# Altium PCB SparkFun_Pro_Micro_v13a.PcbDoc
Units mil, origin at the board's own origin, x right, y up, seen from the top; angles counter-clockwise.
Board outline 700 x 1300 mil, 2 copper layers (Top, Bottom); 33 components, 42 nets, 128 pads, 47 vias.
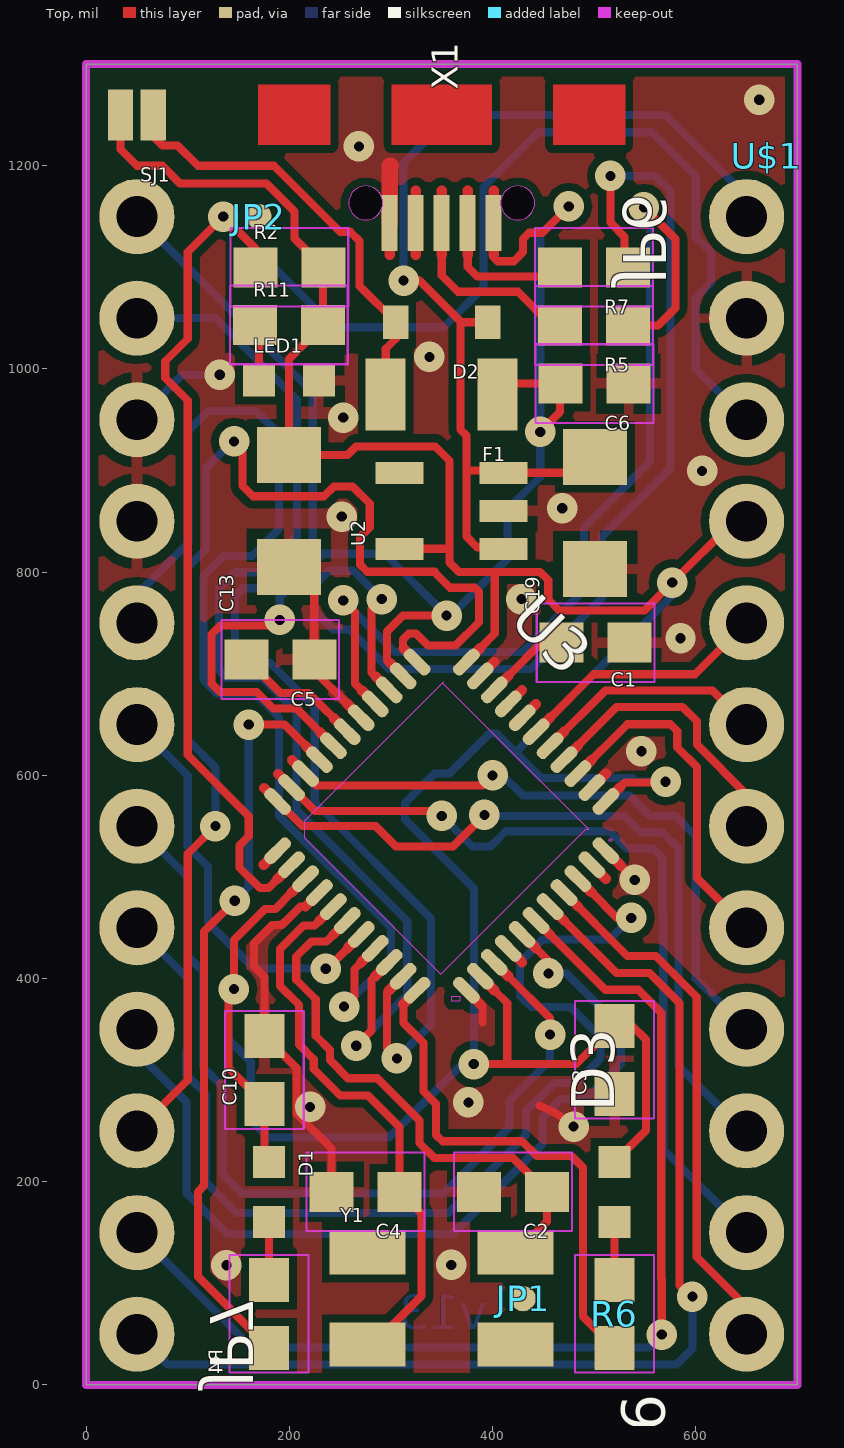
[diagram p0: Top view]
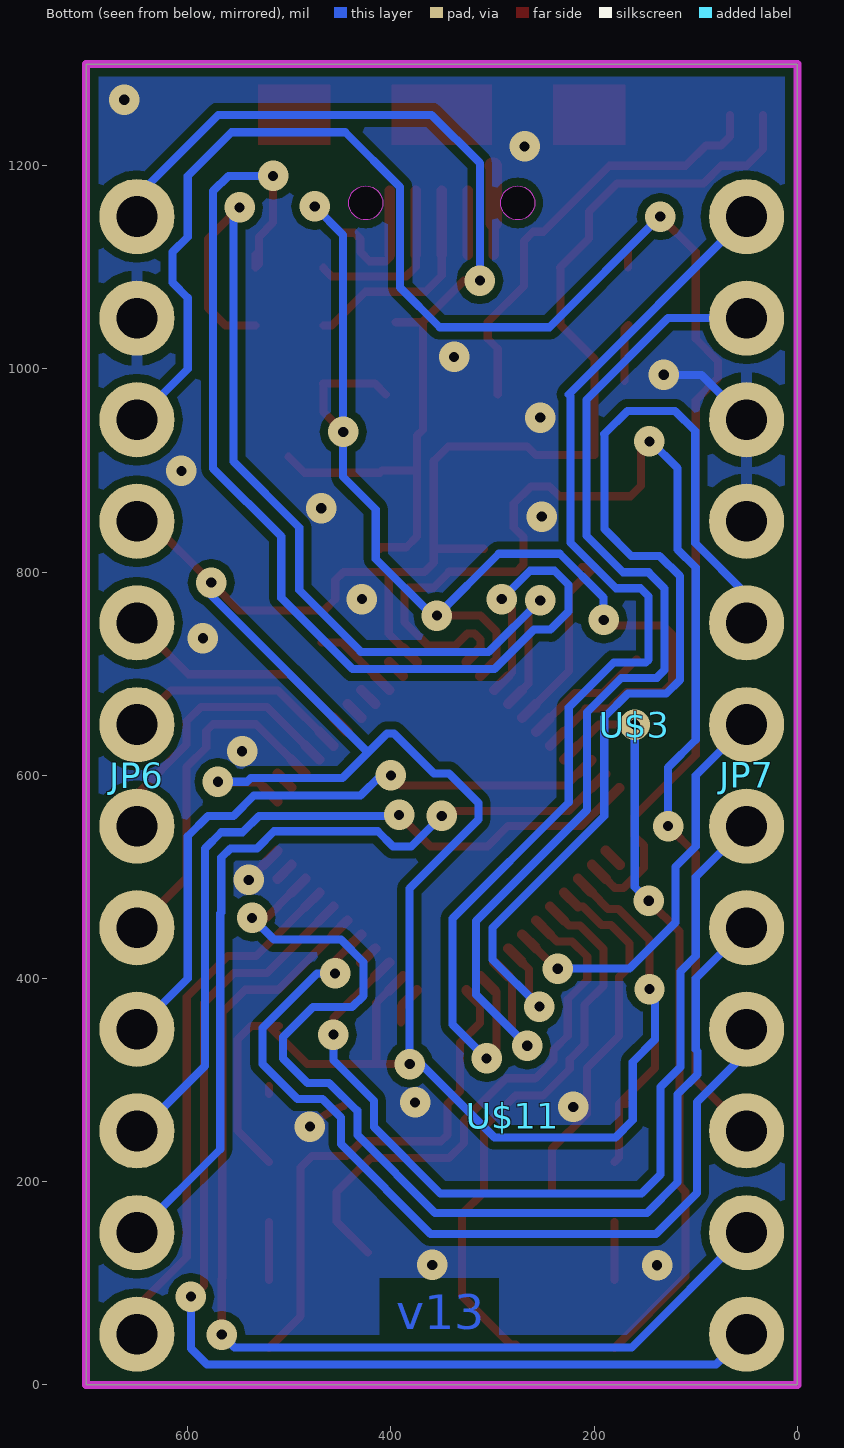
[diagram p1: Bottom view, seen from below]

## Layer stack, top to bottom
Top Solder: solder mask 0.4, Solder Resist, Dk 3.5
Top: signal copper 1.378
Dielectric 1: dielectric 12.6, FR-4, Dk 4.8
Bottom: signal copper 1.378
Bottom Solder: solder mask 0.4, Solder Resist, Dk 3.5

## Board outline
700,1300 0,1300 0,0 700,0
cut-out: 275.2,1146.66 ccw(c275.2,1163.39) 291.93,1163.39 ccw(c275.2,1163.39) 275.2,1180.12 ccw(c275.2,1163.39) 258.47,1163.39 ccw(c275.2,1163.39)
cut-out: 424.8,1146.66 ccw(c424.8,1163.39) 441.53,1163.39 ccw(c424.8,1163.39) 424.8,1180.12 ccw(c424.8,1163.39) 408.07,1163.39 ccw(c424.8,1163.39)

## Design rules (kind name [scope] priority, off if disabled: settings)
BoardOutlineClearance mdCopperDimension [All] p1: gap=10 ignorepadtopadclearanceinfootprint=FALSE except(0: Arc-SplitContinuation Track-SplitContinuation SMDPad-SplitContinuation THPad-SplitContinuation Via-SplitContinuation Fill-SplitContinuation Poly-SplitContinuation Region-SplitContinuation Text-SplitContinuation; 7: Poly-OutlineEdge Poly-CavityEdge Poly-CutoutEdge Poly-SplitBarrior)
Clearance Clearance_for_PolygonClass_Isolate_8 [InPolygonClass('Isolate_8') vs IsArc Or IsTrack Or IsPad Or IsVia Or IsFill Or IsRegion Or IsText] p1: gap=8 ignorepadtopadclearanceinfootprint=FALSE
Clearance "Clearance (Same Net)" [All] p2: gap=7 ignorepadtopadclearanceinfootprint=FALSE
Clearance [All] p3: gap=7 ignorepadtopadclearanceinfootprint=FALSE
HoleSize HoleSize_For_NetClass_vcc [InNetClass('vcc')] p1: absolutevalues=TRUE maxlimit=0 minlimit=0 maxpercent=80.000 minpercent=20.000
HoleSize [All] p2: absolutevalues=TRUE maxlimit=100000 minlimit=15 maxpercent=80.000 minpercent=20.000
HoleToHoleClearance mdDrill [All] p1: gap=7 allowstackedmicrovias=TRUE
MinimumSolderMaskSliver [All] p1 off: minsoldermaskwidth=10
PasteMaskExpansion Expansion_SMDPaste_OFF [InPadClass('SMDPaste_OFF')] p1: expansion=0
PasteMaskExpansion mlMinCreamFrame [All] p2: expansion=0
PolygonConnect PolygonConnect_For_PolygonThermal_ON_Width100000_Gap100000 [InPolygonClass('PolygonThermal_ON_Width100000_Gap100000') vs Not IsVia] p1: connectstyle=Relief reliefconductorwidth=10 reliefentries=4 polygonreliefangle="90 Angle" airgapwidth=10
PolygonConnect ThermalVias [IsVia] p2: connectstyle=Direct reliefconductorwidth=10 reliefentries=4 polygonreliefangle="90 Angle" airgapwidth=10
PolygonConnect [All] p3: connectstyle=Relief reliefconductorwidth=10 reliefentries=4 polygonreliefangle="90 Angle" airgapwidth=10
RoutingVias [All] p1: holewidth=15 width=35 viastyle="Through Hole" minholewidth=15 minwidth=35 maxholewidth=100 maxwidth=100
SolderMaskExpansion mlMinStopFrame [All] p1: expansion=4 istentingtop=FALSE
Width Width_For_NetClass_vcc [InNetClass('vcc')] p1: maxlimit=10 minlimit=99999 preferedwidth=5 toplayer_minwidth=0 bottomlayer_minwidth=0 minimp=50.000000 maximp=50.000000 favimp=50.000000
Width [All] p2: maxlimit=10 minlimit=8 preferedwidth=8
26 further rules are at their usual default settings.

## Classes and differential pairs
polygon class PolygonThermal_ON_Width100000_Gap100000: Polygon_1_Net_GND Polygon_2_Net_GND
polygon class Isolate_8: Polygon_1_Net_GND Polygon_2_Net_GND
pad class SMDPaste_OFF: JP1-1 JP2-1
net class vcc: GND RAW

## Components (designator, comment, footprint, x,y, rotation, side; value= is the part's Value field where it differs from the comment)
C1 "0.1uF" 0603-CAP 501.5,730.6 r180 top
C2 "22pF" 0603-CAP 420,190 r180 top
C3 "0.1uF" 0603-CAP 520,320 r90 top
C4 "22pF" 0603-CAP 275,190 r180 top
C5 "1uF" 0603-CAP 191.1,714 r180 top
C6 "1uF" 0603-CAP 500.5,985.6 r180 top
C10 "1uF" 0603-CAP 175.5,310 r90 top
C13 "10uF" EIA3216 199.5,860.3 r90 top
C19 "10uF" EIA3216 500.9,858.4 r90 top
D1 "Yellow" LED-0603 180,190 r180 top
D2 "" SOD-323 350,1046 r180 top
D3 "Green" LED-0603 520,190 r180 top
F1 "500mA" PTC-1206 350,975 r180 top
FRAME1 "" CREATIVE_COMMONS -679.22,-400 r0 top
JP1 "" MICRO-FIDUCIAL 430,85 r0 top
JP2 "" MICRO-FIDUCIAL 170,1150 r0 top
JP6 "" 1X12 650,1150 r270 bottom
JP7 "" 1X12 50,50 r90 bottom
LED1 "Red" LED-0603 199.5,988.4 r270 top
R2 "10K" 0603-RES 200,1100 r0 top
R4 "330" 0603-RES 180,70 r90 top
R5 "22" 0603-RES 500,1042.8 r180 top
R6 "330" 0603-RES 520,70 r90 top
R7 "22" 0603-RES 500,1100 r180 top
R11 "1K" 0603-RES 199.5,1043.3 r0 top
SJ1 "Closed for 5V Board" SJ_2S 50,1250 r180 top
U2 "MIC5219" SOT23-5 359.7,860.4 r90 top
U3 "ATMEGA32U4" QFN-44-NOPAD_1:1-OUTFAKES 350,550 r315 top
U$1 "" SFE-LOGO-FLAME 670,1210 r90 top
U$3 "" OSHW-LOGO-S 160,650 r90 bottom
U$11 "" SFE-NEW-WEBLOGO 280,265 r90 bottom
X1 "" USB-AB-MICRO-SMD-V03-IN&OUT 350,1250 r270 top
Y1 "16MHz" CRYSTAL-SMD-5X3 350,85 r0 top

## Footprints (in the part's own frame and the unit in brackets; to place one, negate y for a bottom-side part, rotate by r counter-clockwise, add the part's x,y. Pads: shape width x height; smd on the part's side, far side on the other; paste and mask are expansions set on the pad)
1X12 [mil] "1X12"
  round 74 hole 40: 1(0,0) 2(100,0) 3(200,0) 4(300,0) 5(400,0) 6(500,0) 7(600,0) 8(700,0) 9(800,0) 10(900,0) 11(1000,0) 12(1100,0)
0603-CAP [mm] "0603-CAP"
  rect 1.1x1 smd: 1(-0.85,0) 2(0.85,0)
  Top keep-out lines w0.051: 1.473,0.983 1.473,-0.983 -1.473,-0.983 -1.473,0.983 1.473,0.983
0603-RES [mm] "0603-RES"
  rect 1.1x1 smd: 1(-0.85,0) 2(0.85,0)
  Top keep-out lines w0.051: -1.473,-0.983 -1.473,0.983 1.473,0.983 1.473,-0.983 -1.473,-0.983
CREATIVE_COMMONS [mil] "CREATIVE_COMMONS"
CRYSTAL-SMD-5X3 [mil] "CRYSTAL-SMD-5X3"
  rect 74.8x43.31 smd: 1(-72.83,-45.28) 2(72.83,-45.28) 3(72.83,45.28) 4(-72.83,45.28)
EIA3216 [mil] "EIA3216"
  rect 55.12x62.99 smd: A(55.12,0) C(-55.12,0)
LED-0603 [mil] "LED-0603"
  rect 31.5x31.5 smd: A(0,-29.53) C(0,29.53)
MICRO-FIDUCIAL [mil] "MICRO-FIDUCIAL"
  rrect100% 25x25 smd paste+0: 1(0,0)
OSHW-LOGO-S [mil] "OSHW-LOGO-S"
PTC-1206 [mm] "PTC-1206"
  rect 1x1.8 smd: 1(-1.4,0) 2(1.4,0)
QFN-44-NOPAD_1:1-OUTFAKES [mil] "QFN-44-NOPAD_1:1-OUTFAKES"
  rrect85% 31.5x11.81 smd: 1(-131.36,97.05) 2(-131.36,77.64) 3(-131.36,58.23) 4(-131.36,38.82) 5(-131.36,19.41) 6(-131.36,0) 7(-131.36,-19.41) 8(-131.36,-38.82) 9(-131.36,-58.23) 10(-131.36,-77.64) 11(-131.36,-97.05) 23(131.36,-97.05) 24(131.36,-77.64) 25(131.36,-58.23) 26(131.36,-38.82) 27(131.36,-19.41) 28(131.36,0) 29(131.36,19.41) 30(131.36,38.82) 31(131.36,58.23) 32(131.36,77.64) 33(131.36,97.05)
  rrect85% 11.81x31.5 smd: 12(-97.05,-131.36) 13(-77.64,-131.36) 14(-58.23,-131.36) 15(-38.82,-131.36) 16(-19.41,-131.36) 17(0,-131.36) 18(19.41,-131.36) 19(38.82,-131.36) 20(58.23,-131.36) 21(77.64,-131.36) 22(97.05,-131.36) 34(97.05,131.36) 35(77.64,131.36) 36(58.23,131.36) 37(38.82,131.36) 38(19.41,131.36) 39(0,131.36) 40(-19.41,131.36) 41(-38.82,131.36) 42(-58.23,131.36) 43(-77.64,131.36) 44(-97.05,131.36)
  Top lines w10: -97.05,-150.77 -97.05,-131.36 ; -150.14,-97.05 -131.36,-97.05 ; -77.64,-150.77 -77.64,-131.36 ; -150.14,-77.64 -131.36,-77.64 ; -58.23,-150.77 -58.23,-131.36 ; -150.14,-58.23 -131.36,-58.23 ; -38.82,-150.77 -38.82,-131.36 ; -150.14,-38.82 -131.36,-38.82 ; -19.41,-150.77 -19.41,-131.36 ; -150.14,-19.41 -131.36,-19.41 ; 0,-150.77 0,-131.36 ; -150.14,0 -131.36,0 ; 19.41,-150.77 19.41,-131.36 ; -150.14,19.41 -131.36,19.41 ; 38.82,-150.77 38.82,-131.36 ; -150.14,38.82 -131.36,38.82 ; 58.23,-150.77 58.23,-131.36 ; -150.14,58.23 -131.36,58.23 ; 77.64,-150.77 77.64,-131.36 ; -150.14,77.64 -131.36,77.64 ; 97.05,-150.77 97.05,-131.36 ; -150.14,97.05 -131.36,97.05 ; 131.36,-97.05 150.77,-97.05 ; -97.05,131.36 -97.05,150.77 ; 131.36,-77.64 150.77,-77.64 ; -77.64,131.36 -77.64,150.77 ; 131.36,-58.23 150.77,-58.23 ; -58.23,131.36 -58.23,150.77 ; 131.36,-38.82 150.77,-38.82 ; -38.82,131.36 -38.82,150.77 ; 131.36,-19.41 150.77,-19.41 ; -19.41,131.36 -19.41,150.77 ; 131.36,0 150.77,0 ; 0,131.36 0,150.77 ; 131.36,19.41 150.77,19.41 ; 19.41,131.36 19.41,150.77 ; 131.36,38.82 150.77,38.82 ; 38.82,131.36 38.82,150.77 ; 131.36,58.23 150.77,58.23 ; 58.23,131.36 58.23,150.77 ; 131.36,77.64 150.77,77.64 ; 77.64,131.36 77.64,150.77 ; 131.36,97.05 150.77,97.05 ; 97.05,131.36 97.05,150.77
SFE-LOGO-FLAME [mil] "SFE-LOGO-FLAME"
SFE-NEW-WEBLOGO [mil] "SFE-NEW-WEBLOGO"
SJ_2S [mil] "SJ_2S"
  rect 25x50 smd: 1(-16.22,0) 2(16.22,0)
SOD-323 [mil] "SOD-323"
  rect 24.8x32.68 smd: 1(-45.28,0) 2(45.28,0)
SOT23-5 [mil] "SOT23-5"
  rect 21.65x47.24 smd: 1(-37.4,-51.19) 2(0,-51.19) 3(37.4,-51.19) 4(37.4,51.19) 5(-37.4,51.19)
USB-AB-MICRO-SMD-V03-IN&OUT [mm] "USB-AB-MICRO-SMD-V03-IN&OUT"
  rect 1.4x0.4 smd: D+1(2.7,0) D-1(2.7,0.65) GND1(2.7,-1.3) ID1(2.7,-0.65) VBUS1(2.7,1.3)
  Top region: -0.75,-4.584 -0.75,-2.784 0.75,-2.784 0.75,-4.584
  Top region: -0.75,-1.25 -0.75,1.25 0.75,1.25 0.75,-1.25
  Top region: -0.75,2.784 -0.75,4.584 0.75,4.584 0.75,2.784
  Top lines w0.254: 3.505,-1.3 2.7,-1.3 1.895,-1.3 ; 3.505,-0.65 2.7,-0.65 1.895,-0.65 ; 3.505,0 2.7,0 1.895,0 ; 3.505,0.65 2.7,0.65 1.895,0.65 ; 3.505,1.3 2.7,1.3 1.895,1.3

## Part data
C1 C2 C3 C4 C5 C6 C10: library part 0603-CAP, PackageName=0603-CAP
C13 C19: library part EIA3216, PackageName=EIA3216
D1 D3 LED1: library part LED-0603, PackageName=LED-0603
D2: library part SOD-323, PackageName=SOD-323
F1: library part PTC-1206, PackageName=PTC-1206
FRAME1: library part CREATIVE_COMMONS, PackageName=CREATIVE_COMMONS
JP1 JP2: library part MICRO-FIDUCIAL, PackageName=MICRO-FIDUCIAL
JP6 JP7: library part 1X12, PackageName=1X12
R2 R4 R5 R6 R7 R11: library part 0603-RES, PackageName=0603-RES
SJ1: library part SJ_2S, PackageName=SJ_2S
U2: library part SOT23-5, PackageName=SOT23-5
U3: library part QFN-44-NOPAD_1:1-OUTFAKES, PackageName=QFN-44-NOPAD_1:1-OUTFAKES
U$1: library part SFE-LOGO-FLAME, PackageName=SFE-LOGO-FLAME
U$3: library part OSHW-LOGO-S, PackageName=OSHW-LOGO-S
U$11: library part SFE-NEW-WEBLOGO, PackageName=SFE-NEW-WEBLOGO
X1: library part USB-AB-MICRO-SMD-V03-IN&OUT, PackageName=USB-AB-MICRO-SMD-V03-IN&OUT
Y1: library part CRYSTAL-SMD-5X3, PackageName=CRYSTAL-SMD-5X3

## Free pads (board coordinates)
  round 33.46 hole 33.46 unplated: MH1(424.8,1163.39) MH2(275.2,1163.39)

## Via types
v1: diameter 30/30 (per signal layer), hole 10, Top to Bottom, 47 vias

## Nets (pads, with @x,y where several pads share a name; then routed paths per layer and width w, separated by ;. In a path a pad name is that pad's centre, name@x,y a point inside that pad or via, vN(x,y) a via of type N, cw(c..) or ccw(c..) an arc to the next point about the centre after c; other vN are vias at no path point)
A0: JP6.8 U3.36 | length 342.5
  Top w8: U3.36 532.65,650.3 575.1,650.3 581.8,643.6 581.8,627.5 601.2,608.1 601.2,498.8 JP6.8
A1: JP6.7 U3.37 | length 281.5
  Top w8: U3.37 522.1,667.2 587.1,667.2 601.1,653.2 601.1,630.2 650,581.3 JP6.7
A2: JP6.6 U3.38 | length 229.9
  Top w8: U3.38 511.05,683.6 616.4,683.6 JP6.6
A3: JP6.5 U3.39 | length 232.4
  Top w8: 456.61,656.61 499.5,699.5 ; 499.2,699.5 499.5,699.5 ; JP6.5 649.7,750 599.2,699.5 499.5,699.5
A4: U3.40
A5: U3.41
AREF: C1.2 U3.42 | length 66.2
  Top w8: 415.44,697.78 448.25,730.6 C1.2
D2: JP7.8 U3.19 | length 1095.7
  Top w8: v1(253.9,372.4) 264,382.5 264,409.1 270.84,415.94
  Bottom w8: JP7.8 50,778.1 100.5,828.6 100.5,938.8 120.3,958.6 167.2,958.6 190,935.8 189.9,935.7 189.9,842.4 163.5,816 135.5,816 115.5,796 115.5,694 129,680.5 166.7,680.5 190,657.2 190,560 300,450 300,418.5 v1(253.9,372.4)
D3: JP7.7 U3.18 | length 388.2
  Top w8: v1(235.8,409.7) 237.1,409.7 257.07,429.67 257.12,429.67
  Bottom w8: JP7.7 100,600 100,530 120,510 120,455 165.3,409.7 v1(235.8,409.7)
D4: JP7.6 U3.25 | length 876.6
  Top w8: 415.44,402.22 456.6,361.05 v1(456.6,344.9)
  Bottom w8: JP7.6 100,500 100,422 115,407 115,312.9 134.5,293.4 134.5,207.3 153.2,188.6 351.5,188.6 416.7,253.8 416.7,279.7 456.6,319.6 v1(456.6,344.9)
D5: JP7.5 U3.31 | length 1084.9
  Top w8: 497.78,484.56 522.65,459.7 v1(536.6,459.7)
  Bottom w8: JP7.5 100,400 100,330 98.3,328.3 98.3,305.7 117.9,286.1 117.9,199.5 148,169.4 356.5,169.4 433,245.9 433,270 433.6,270 460.9,297.3 482.3,297.3 506.3,321.3 506.3,342.3 476.8,371.8 438.2,371.8 427,383 427,416 449.3,438.3 515.2,438.3 v1(536.6,459.7)
D6: JP7.4 U3.27 | length 912.7
  Top w8: U3.27 455,417.55 v1(455,405) ; v1(455,405) 455,417.16 v1(455,405)
  Bottom w8: JP7.4 50,327.3 98.9,278.4 98.9,188.9 139.1,148.7 361,148.7 449.3,237 449.3,263.3 467.4,281.4 491.9,281.4 526.5,316 526.5,351.2 472.7,405 v1(455,405)
D7: JP7.3 U3.1 | length 1290.4
  Top w8: JP7.3 100,300 100,522.8 v1(127.2,550) ; v1(145.6,928.6) 145.6,926.7 154,918.3 154,885 164.3,874.7 234.1,874.7 243.8,884.4 262.2,884.4 279.1,867.5 279.1,844.1 269.5,834.5 269.5,807.6 276.7,800.4 343.1,800.4 343.1,799.6 358.1,784.6 382.6,784.6 386.6,780.6 386.6,750.7 363.7,727.8 336.4,727.8 324.6,739.6 317.6,739.6 311.8,733.8 311.8,725.45 U3.1 312.1,725.15
  Bottom w8: v1(127.2,550) 127.2,607.8 100,635 100,804.4 118,822.4 118,902.3 144.3,928.6 v1(145.6,928.6)
D8: JP7.2 U3.28 | length 1046.2
  Top w8: U3.28 511.1,388.9 543.5,388.9 566,366.4 566,105 566.5,104.5 v1(566.5,49.6)
  Bottom w8: JP7.2 163,37 553.9,37 v1(566.5,49.6)
D9: JP7.1 U3.29 | length 1059.5
  Top w8: 470.33,457.12 521.95,405.5 554.5,405.5 584,376 584,98 595.1,86.9 v1(596.8,86.9)
  Bottom w8: JP7.1 80,20 581,20 596.8,35.8 v1(596.8,86.9)
D10: JP6.12 U3.30 | length 525.4
  Top w8: U3.30 532.6,422.3 560.6,422.3 601,381.9 601,126 650,77 JP6.12
D11: U3.12
D12: U3.26
D13: U3.32
D14: R4.1 U3.8 | length 728.4
  Top w8: v1(146.3,476.5) 116.1,446.3 116.1,196.1 110,190 110,106.54 R4.1 ; v1(160,650) 195.1,650 216.39,628.71
  Bottom w8: v1(146.3,476.5) 160,490.2 v1(160,650)
D+: R5.1 U3.4 | length 970.2
  Top w8: v1(253,772.2) 264.7,760.5 264.7,690.2 U3.4 ; R5.1 562.8,1042.8 580,1060 580,1128 v1(549,1159)
  Bottom w8: v1(253,772.2) 303.8,721.4 429.7,721.4 429.7,722 490.2,782.5 490.2,844.1 555,908.9 555,1153 v1(549,1159)
D-: R7.1 U3.3 | length 1129.9
  Top w8: 285.01,697.34 281,701.35 281,763.6 v1(290.9,773.5) ; v1(516,1190) 516,1144 530,1130 530,1103.46 R7.1 R7.1@533.46,1112.54
  Bottom w8: v1(290.9,773.5) 263,801.4 239,801.4 225.2,787.6 225.2,761.3 243.1,743.4 243.4,743.7 259.1,743.7 298.2,704.6 438,704.6 507.9,774.5 507.9,835 575,902.1 575,1175 560,1190 v1(516,1190)
GND: C1.1 C2.2 C3.1 C4.2 C5.1 C6.1 C10.2 C13.C C19.C JP6.2 JP7.9 JP7.10 LED1.C U2.2 U3.5 U3.15 U3.23 U3.33 U3.35 U3.43 X1.GND1 | length 785.7
  Top w8: C13.C@211.82,805.18 C13.C 224.56,780.12 C5.1 224.56,702.88 257.56,669.89 ; 215.94,470.84 211.04,470.84 192.9,452.7 183.5,452.7 165.2,434.4 165.2,411.8 175.5,401.5 C10.2 182.26,336.7 182.5,336.7 207.2,312 207.2,266.9 241.54,232.56 C4.2 ; 387.99,374.77 390,372.75 390,357 ; 446.5,274.8 cw(c408.88,176.78) v1(479.8,254.2) ; U3.33 537.25,500 v1@550,500 ; C3.1 C3.1@520,294 ; v1@539.84,497 v1(540,497)
  Top w16: X1.GND1 298.82,1200 300,1200
  Bottom w8: JP7.10 94.2,994.2 v1(131.5,994.2)
  other v1: 138.1,117.8 359.4,118.2 220.5,273.7 376.2,278.1 546.5,623.7 585,735 428.5,773.5 251.6,854.7 468.6,862.8 606.2,899.7 253,952.1 337.9,1011.9 268.5,1219 662.5,1265
MISO: JP6.10 U3.11 | length 746.9
  Top w8: U3.11 212.75,550 213.3,550 250,550 285,550 305,530 361,530 v1(392,561)
  Bottom w8: v1(392,561) 393,560 530,560 546,544 567,544 583,528 583,314 647,250 JP6.10
MOSI: JP6.11 U3.10 | length 809.2
  Top w8: U3.10 225.2,565 226.14,565 250,565 345,565 v1(350,560)
  Bottom w8: v1(350,560) 380,530 398,530 413,545 515,545 532,528 558,528 567,519 567,465 568,464 568,232 JP6.11
N$1: C4.1 U3.16 Y1.1 | length 538.3
  Top w8: 190.9,429.2 190.9,429.1 ; 229.67,457.12 224.75,452.2 214,452.2 190.9,429.1 ; Y1.1 282.17,39.72 330,87.56 330,168.46 C4.1 308.46,254.04 277.5,285 250.1,285 224,311.1 224,320.5 209.5,335 209.5,374.2 190.9,392.8 190.9,429.1
N$2: C2.1 U3.17 Y1.3 | length 514
  Top w8: 243.39,443.39 236.4,436.4 221.7,436.4 206.8,421.5 206.8,398.8 226,379.6 226,343.7 240,329.7 240,319.7 257.9,301.8 286.8,301.8 328.2,260.4 328.2,237.9 342.9,223.2 420.26,223.2 C2.1 453.46,160.91 Y1.3
N$3: D2.2 F1.2 SJ1.1 | length 436.4
  Top w8: SJ1.1 66.22,1228.78 75,1220 90,1220 110,1200 185,1200 250,1135 260,1135 269,1126 269,1081.72 D2.2 304.72,1029.72 294.88,1019.88 F1.2
N$4: C5.2 U3.6 | length 128.9
  Top w8: C5.2 158.5,714 191.4,681.1 218.9,681.1 U3.6
N$5: D1.C R4.2 | length 57
  Top w8: R4.2 D1.C
N$6: R7.2 X1.D-1 | length 142.5
  Top w8: X1.D-1 375.59,1100.41 385,1091 458.54,1091 466.54,1099 R7.2
N$7: D3.C R6.2 | length 57
  Top w8: R6.2 D3.C
N$8: R5.2 X1.D+1 | length 188.6
  Top w8: X1.D+1 350,1092 366,1076 425,1076 458.2,1042.8 R5.2
N$38: LED1.A R11.1 | length 56.5
  Top w8: R11.1 169.97,1039.36 LED1.A
RAW: C19.A D2.1 JP6.1 U2.1 U2.3 | length 1014.6
  Top w8: v1(312.5,1087) 328,1087 369,1046 ; D2.1 369,1046 ; U2.1 409.38,824.5 384.9,824.5 374.3,835.1 374.3,900 ; C19.A 485.18,897.8 U2.3 408.69,900 374.3,900 ; 369,1046 368.6,1045.6 368.6,940.1 374.3,934.4 374.3,900
  Bottom w8: v1(312.5,1087) 312.5,1202.5 360,1250 570,1250 650,1170 JP6.1
RESET: JP6.3 R2.1 U3.13 | length 1754
  Top w8: R2.1 166.54,1118.46 v1(135,1150) 100,1115 100,1029.7 77.9,1007.6 77.9,991.1 100,969 100,620 160,560 160,540 151,531 151,509 171,489 179.65,489 185.65,495 185.65,495.44 188.49,498.29
  Bottom w8: v1(135,1150) 244,1041 352,1041 391,1080 391,1179 445,1233 557,1233 600,1190 600,1130 615,1115 615,1085 600,1070 600,1000 JP6.3
RXI: JP7.11 U3.20 | length 1067.8
  Top w8: v1(265.9,333.9) 281,349 281,398.66 284.56,402.22
  Bottom w8: JP7.11 127.3,1050 207.6,969.7 207.6,835.8 171.7,799.9 146.3,799.9 146.3,799.5 130.7,783.9 130.7,703.6 138.5,695.8 ; 138.1,695.8 138.5,695.8 ; v1(265.9,333.9) 316.1,384.1 316.1,456.7 207,565.8 207,662.1 173.3,695.8 138.5,695.8
SCK: JP6.9 U3.9 | length 629.8
  Top w8: U3.9 227.65,590 ; U3.9@226.48,590 227.65,590 ; v1(400,600) 390,590 250,590 227.65,590
  Bottom w8: v1(400,600) 410,600 430,580 535,580 555,560 580,560 600,540 600,400 JP6.9
TXLED: R6.1 U3.22 | length 490.8
  Top w8: 312.01,374.77 312.25,375 312.5,375 312.5,356.4 332.1,336.8 332.1,289.1 344.5,276.7 344.5,246.1 350.8,239.8 429.1,239.8 443.6,225.3 477.7,225.3 489,214 489,67.54 R6.1
TXO: JP7.12 U3.21 | length 1132.3
  Top w8: 298.29,388.49 296.79,387 296,387 296,331.3 v1(305.9,321.4)
  Bottom w8: JP7.12 225,975 223.1,973.1 223.1,828.9 178.3,784.1 154.4,784.1 146.6,776.3 146.6,713.7 149.2,711.1 180.7,711.1 225,666.8 225,573.5 339.3,459.2 339.3,354.8 v1(305.9,321.4)
UVCC: C6.2 F1.1 U3.2 U3.7 X1.VBUS1 | length 1321.9
  Top w8: v1(190.6,752.9) 185.2,747.5 132.1,747.5 123.5,738.9 123.5,690.2 131.8,681.9 167.9,681.9 184.2,665.6 208.35,665.6 208.35,664.2 U3.7 ; 298.73,711.06 296.9,712.9 296.2,712.9 296.2,741.7 311.7,757.2 v1(354.8,757.2) ; X1.VBUS1 401.18,1109.82 405,1106 421,1106 430,1115 430,1128 436,1134 449,1134 v1(475,1160) ; F1.1@410.12,980 F1.1 415.72,985.6 C6.2 466.54,985.1 466.54,957.54 v1(447,938)
  Bottom w8: v1(190.6,752.9) 190.6,774.9 233.8,818.1 293.9,818.1 v1(354.8,757.2) 359.1,757.2 414.9,813 414.9,861.8 447,893.9 v1(447,938) ; v1@450,941 v1(447,938) ; v1(475,1160) 447,1132 v1(447,938)
VCC: C3.2 C10.1 C13.A D1.A D3.A JP6.4 R2.2 R11.2 SJ1.2 U2.5 U3.14 U3.24 U3.34 U3.44 | length 3297.3
  Top w8: SJ1.2 33.78,1216.22 50,1200 75,1200 92.5,1182.5 177.5,1182.5 205,1155 205,1128.46 R2.2 232.96,1099.5 R11.2 199.5,1009.84 C13.A ; C10.1@168.46,276.54 C10.1 ; D1.A@178,221.53 D1.A 175.5,224.03 C10.1 ; 202.22,484.56 186.25,468.6 176.2,468.6 145.5,437.9 v1(145.5,389.6) 140,384.1 140,312.04 C10.1 ; C13.A@214.58,915.42 C13.A ; U2.5 353.5,823 cw(c353.5,818.7) 357.8,818.7 ; v1(381.45,315.85) 416.7,315.85 ; 387.99,725.23 402.2,739.45 402.2,797.8 404.7,800.3 ; 401.71,388.49 414.45,375.75 414.45,318.1 ccw(c416.7,318.1) 416.7,315.85 ; C3.2@510.46,353.46 C3.2 ; U3.34 530.25,593 569.6,593 v1(570.3,593.7) ; D3.A 551,250.53 551,340 537.54,353.46 C3.2 ; JP6.4@644.6,850 JP6.4 637.2,850 v1(576.9,789.7) 549.6,762.4 465.7,762.4 454.8,773.3 454.8,792.2 446.7,800.3 404.7,800.3 ; C13.A 257.42,915.42 265.8,923.8 343.6,923.8 357.8,909.6 357.8,818.7 ; 357.8,818.7 357.8,809.4 366.9,800.3 404.7,800.3 ; 416.7,315.85 482.39,315.85 C3.2
  Bottom w8: v1(145.5,389.6) 140,384.1 140,339.8 162,317.8 162,260.6 178.9,243.7 298.2,243.7 370.35,315.85 v1(381.45,315.85) ccw(c381.45,316.2) 381.8,316.2 381.8,488.6 313.8,556.6 313.8,572.9 342.7,601.8 357.6,601.8 396.9,641.1 403.9,641.1 422.5,622.5 ; v1(570.3,593.7) 541.5,593.7 538,597.2 447.8,597.2 422.5,622.5 ; v1(576.9,789.7) 576.9,776.9 422.5,622.5
pads on no net: JP1.1 JP2.1 U2.4 X1.ID1 Y1.2 Y1.4

## Polygon pours and split planes (outlines as drawn)
GND on Top "Polygon_1_Net_GND" (solid, remove dead copper, pour order 1): -5,1305 705,1305 705,-5 -5,-5
GND on Bottom "Polygon_2_Net_GND" (solid, remove dead copper, pour order 0): -5,1305 705,1305 705,-5 -5,-5

## Keep-outs
Top:
  region: 349.2,404.2 491.8,546.8 494.9,546.8 351.4,690.3 351.4,691.7 214.6,554.9 214.6,550.2 214.6,538.8 349.2,404.2
  region: 515,535 515,537.5 517.5,537.5 517.5,535
  region: 360,377.5 360,382.5 367.5,382.5 367.5,377.5
Keep-Out Layer:
  the board outline again, w8

## Other copper
Bottom:
  text "v13" at 395,55 h34

## Silkscreen, mask and mechanical layers (free items; w line width, h text height)
Dimension:
  the board outline again, w8
tDocu:
  lines w3: 140,20 140,1140 ; 610,20 610,1150
  text "N. Seidle, revised by P. Lewis" at 550,-400 h59.5
Top Value:
  text "Valid combinations:" at 830,680 h42.5
  text "3.3V Reg / 8MHz" at 830,580 h42.5
  text "5V Reg / 16MHz" at 830,480 h42.5
  text "Mark back accordingly" at 830,380 h42.5
tPlace:
  circle w10: c650,50 r40
  circle w10: c50,50 r40
  circle w10: c50,650 r40
  circle w10: c50,450 r40
  circle w10: c50,350 r40
  text "J1" at 135,1225 h27.2 r90
  text "TXO" at 135,1110 h27.2 r90
  text "RAW" at 605,1110 h27.2 r90
  text "RXI" at 135,1010 h27.2 r90
  text "GND" at 605,1010 h27.2 r90
  text "GND" at 135,910 h27.2 r90
  text "RST" at 605,910 h27.2 r90
  text "GND" at 135,810 h27.2 r90
  text "VCC" at 605,810 h27.2 r90
  text "2" at 125.2,736.9 h27.2 r90
  text "A3" at 605,720 h34 r90
  text "3" at 140,635 h34 r90
  text "A2" at 605,620 h34 r90
  text "4" at 140,535 h34 r90
  text "A1" at 605,520 h34 r90
  text "5" at 140,435 h34 r90
  text "A0" at 605,420 h34 r90
  text "6" at 140,335 h34 r90
  text "15" at 605,320 h34 r90
  text "Pro" at 215,260 h34
  text "Micro" at 325,260 h34
  text "7" at 140,235 h34 r90
  text "14" at 605,220 h34 r90
  text "8" at 140,135 h34 r90
  text "16" at 605,120 h34 r90
  text "9" at 140,35 h34 r90
  text "10" at 605,20 h34 r90
bPlace:
  region: 540,90 540,115 565,115 565,90
  region: 490,90 490,115 515,115 515,90
  text "3.3V" at 485,125 h27.2 r270
  text "5V" at 535,125 h27.2 r270

## Text inside footprints (layer, text, board x,y; h text height)
FRAME1: tDocu "Designed by:" at -229.22,-400 h59.5; tDocu "http://creativecommons.org/licenses/by-sa/3.0" at -679.22,-300 h59.5; tDocu "Released under the Creative Commons Attribution Share-Alike 3.0 License" at -1479.22,-200 h59.5
U3: 210bmp "C:/Users/pete.lewis/Desktop/MEGA32U4.bmp" at 151.46,545.71 h1.72 r315
X1: tDocu "PCB Front" at 584.65,1433.46 h10.2 r270